# EAGLE board Amazing Lappi (EAGLE 9.7.0)

Size 276.59 x 117.78 mm. Coordinates in mm from the lower left corner, seen from the top.
Outline: 0,0 276.59,0 276.59,117.78 0,117.78 0,0
Copper layers (1*16): Top 0.035mm / dielectric 1.5mm / Bottom 0.035mm
Design rules "default": minimum track width 6mil, minimum drill 0.35mm, track to track 6mil, track to pad 6mil, pad to pad 6mil, via to via 6mil, smd to smd 6mil, copper to edge 40mil, drill to drill 6mil, minimum pad ring 10mil, minimum via ring 8mil, stop-mask expansion 4mil, vias tented up to drill 0mil, thermal gap 10mil

## Footprints (pad centres in the part's own frame; a part is rotated, then mirrored left to right if it is on the bottom)
LEDRD254W60D565H860B = drill 0.981 pad 1.581: 1 -1.27,0; 2 1.27,0
RESAD1016W63L850D250B = drill 0.83 pad 1.43: 1 -5.08,0; 2 5.08,0
ARDUINO-UNO-R3-SHIELD = drill 1.016 pad 1.88: 3.3V 24.13,-2.54; 5V 24.13,0; A0 24.13,12.7; A1 24.13,15.24; A2 24.13,17.78; A3 24.13,20.32; A4 24.13,22.86; A5 24.13,25.4; AREF -24.13,-13.97; D2 -24.13,20.32; D3 -24.13,17.78; D4 -24.13,15.24; D5 -24.13,12.7; D6 -24.13,10.16; D7 -24.13,7.62; D8 -24.13,3.81; D9 -24.13,1.27; D10 -24.13,-1.27; D11 -24.13,-3.81; D12 -24.13,-6.35; D13 -24.13,-8.89; GND@0 24.13,2.54; GND@1 24.13,5.08; GND@2 -24.13,-11.43; IOREF 24.13,-7.62; NC 24.13,-10.16; RES 24.13,-5.08; RX -24.13,25.4; SCL -24.13,-19.05; SDA -24.13,-16.51; TX -24.13,22.86; VIN 24.13,7.62

## Placement (x,y rotation side)
D1  RED  [LEDRD254W60D565H860B]  244.6,68.52 180 top
D2  RED  [LEDRD254W60D565H860B]  154.01,32.27 180 top
D3  RED  [LEDRD254W60D565H860B]  176.26,33.1 180 top
D4  RED  [LEDRD254W60D565H860B]  270.53,44.47 180 top
D5  RED  [LEDRD254W60D565H860B]  106.41,70.58 180 top
D6  RED  [LEDRD254W60D565H860B]  155.42,51.6 180 top
D7  RED  [LEDRD254W60D565H860B]  103.87,70.58 180 top
D8  RED  [LEDRD254W60D565H860B]  96.25,73.12 180 top
D9  RED  [LEDRD254W60D565H860B]  212.26,8.05 180 top
R1  1k  [RESAD1016W63L850D250B]  72.12,50.26 180 top
R2  1k  [RESAD1016W63L850D250B]  72.03,104.96 180 top
R3  1k  [RESAD1016W63L850D250B]  72.12,68.04 180 top
U1  ARDUINO-UNO-R3-SHIELD  [ARDUINO-UNO-R3-SHIELD]  29.84,69.89 180 top

## Library data of the parts
D1-D9 = Tinkercad; CATEGORY: Opto-Electronic; SUB-CATEGORY: LED; VALUE: LED_RED
R1-R3 U1 = Tinkercad

## Nets
D5_A: D5.1 R3.1
D5_C: D5.2 D7.1 D8.1
U1_D12: R2.2 U1.D12
U1_GND: D7.2 D8.2 R1.2 U1.D7 U1.GND@0 U1.GND@1 U1.GND@2

## Tracks (layer width: path | path; a pad name or v marks a point on that pad's centre or on a via)
D5_A  (1 unrouted)
D5_C  (2 unrouted)
U1_D12  (1 unrouted)
U1_GND  (6 unrouted)